# Altium PCB KeyBoarDisplay.PcbDoc
Units mm, origin at the board's own origin, x right, y up, seen from the top; angles counter-clockwise.
Board outline 93.8 x 86.7 mm, 2 copper layers (Top Layer, Bottom Layer); 48 components, 56 nets, 204 pads, 23 vias.
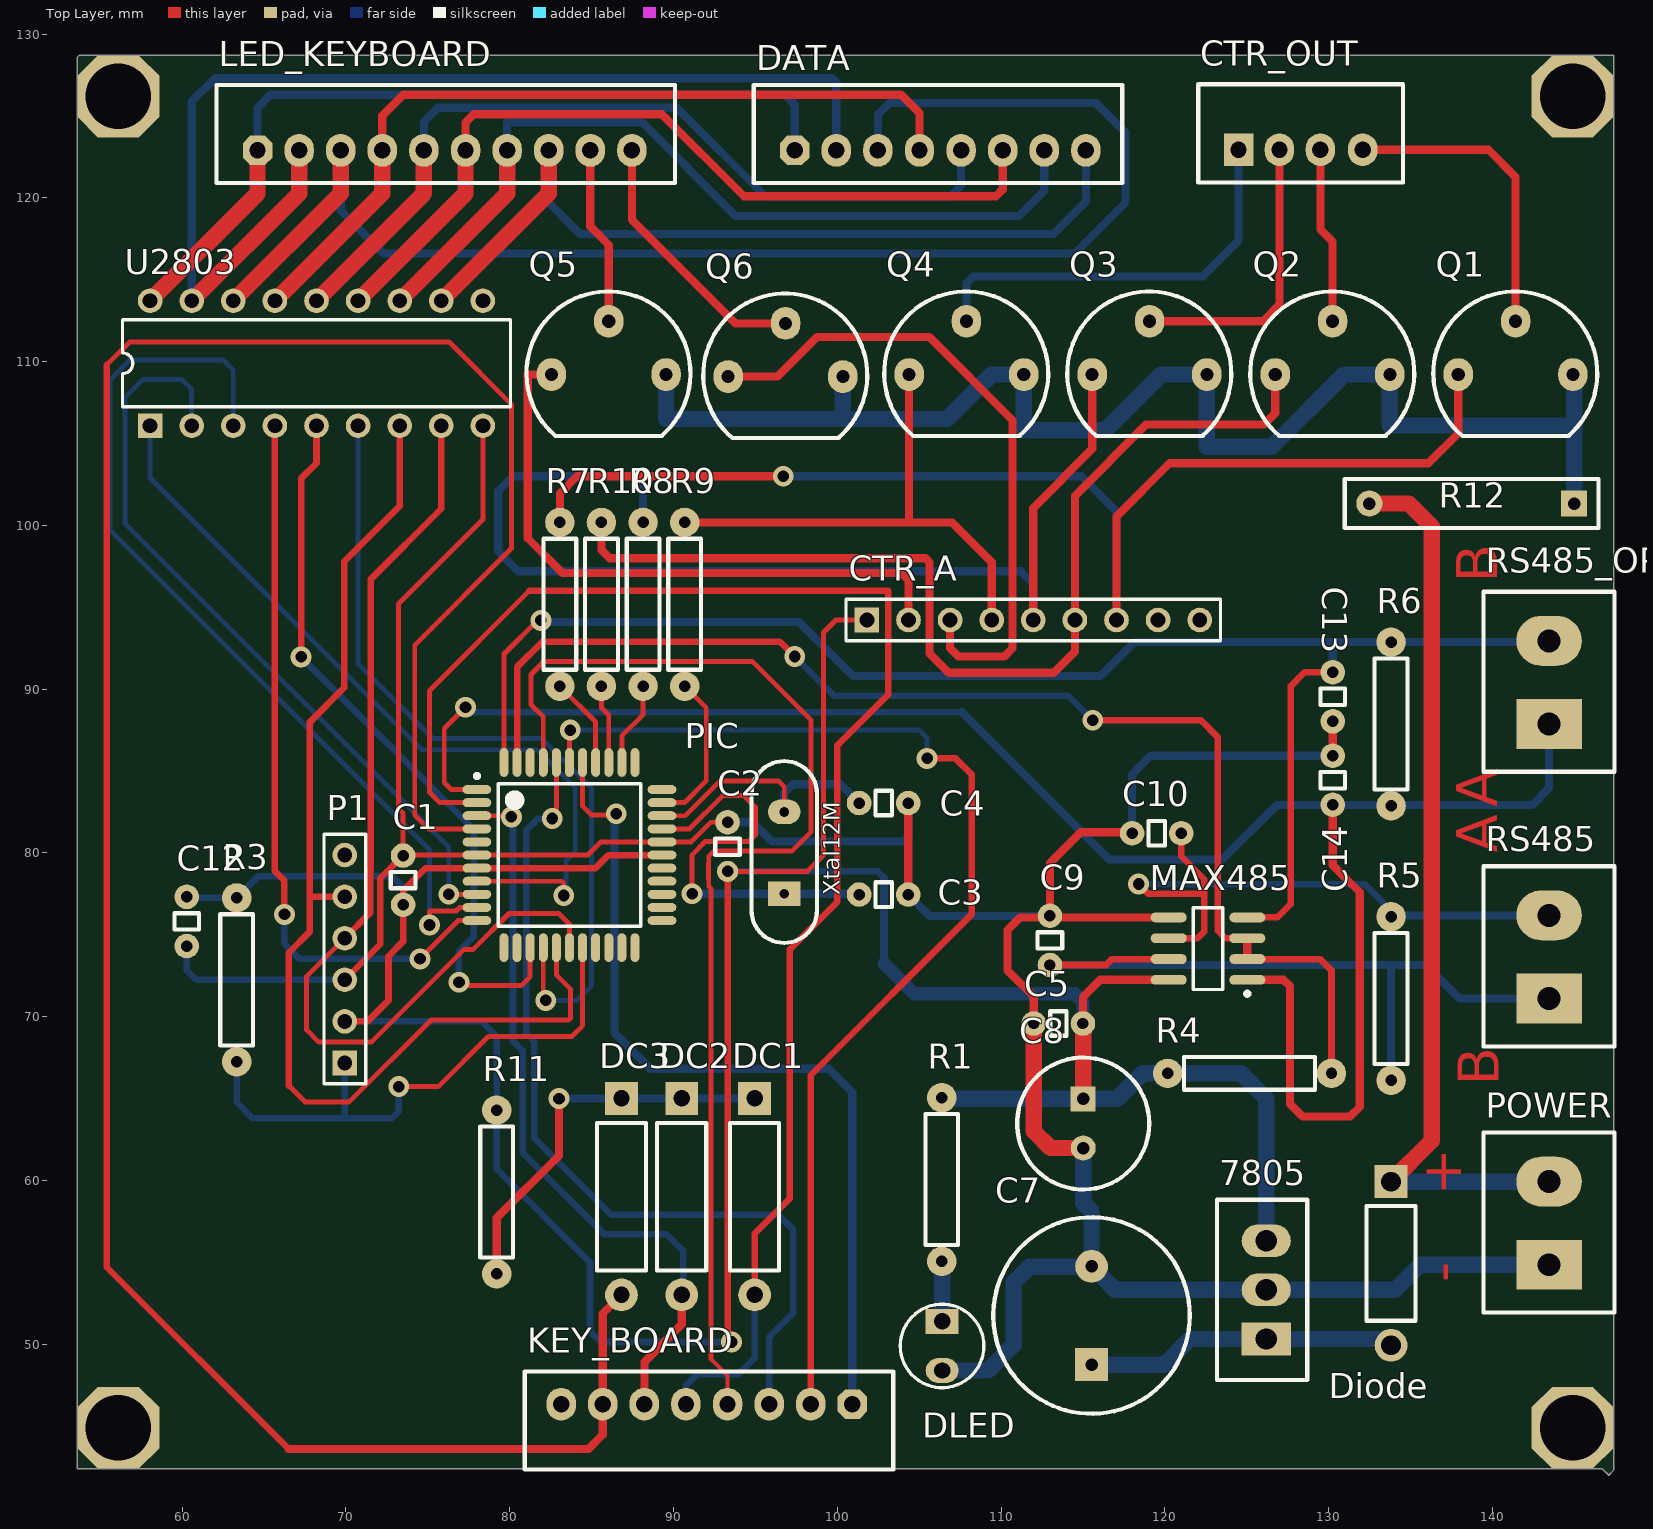
[diagram p0: Top Layer view]
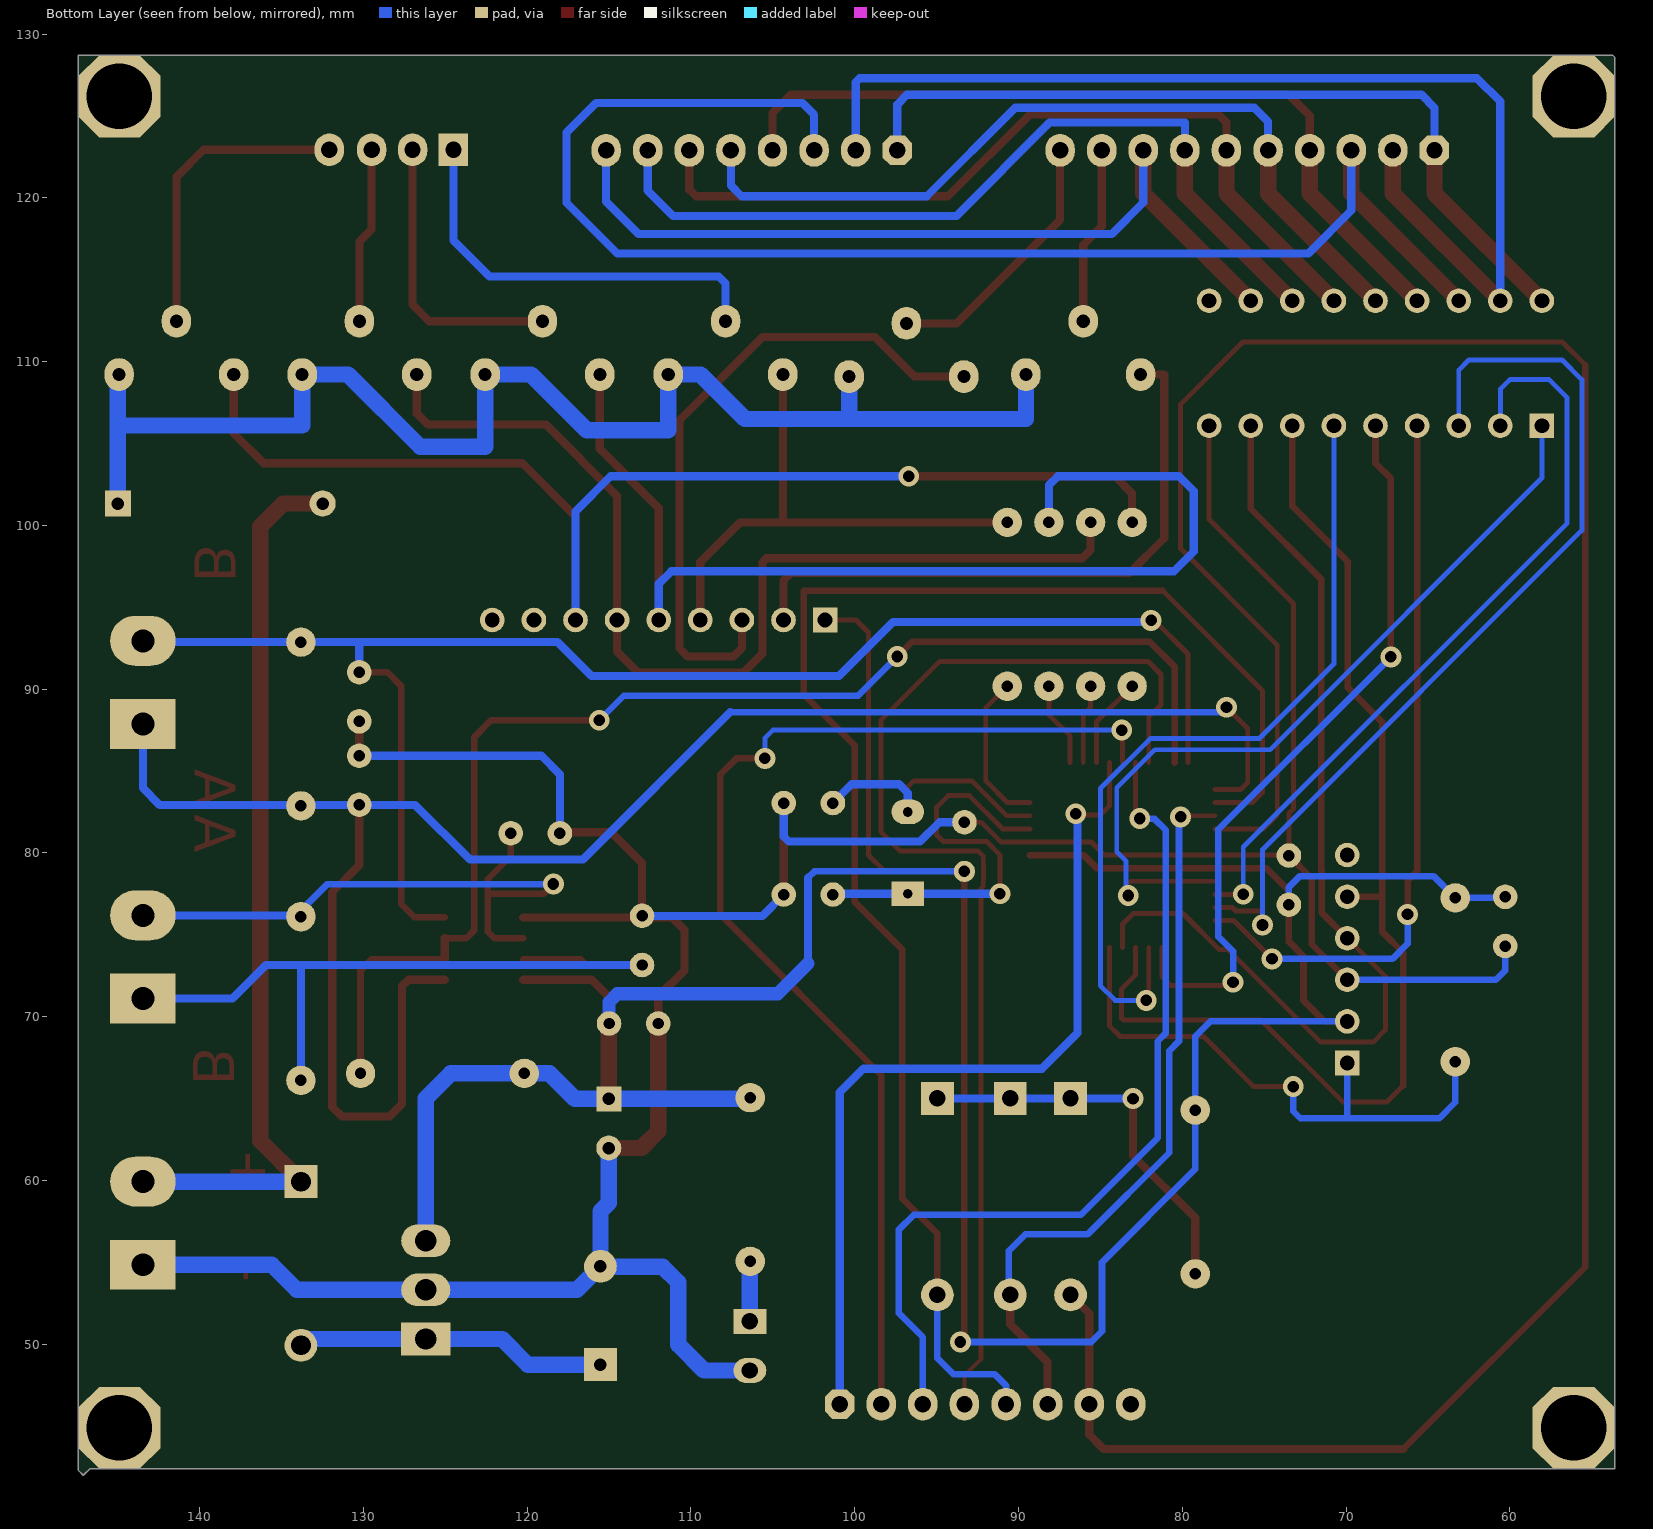
[diagram p1: Bottom Layer view, seen from below]

## Layer stack, top to bottom
Top Layer: signal copper 0.0356
Dielectric: dielectric 0.32, FR-4, Dk 4.8
Bottom Layer: signal copper 0.0356

## Board outline
53.6,128.6 53.7,128.7 147.4,128.7 147.4,42.3 147.1,42 146.7,42.4 53.6,42.4 53.6,128.6

## Design rules (kind name [scope] priority, off if disabled: settings)
Clearance [All] p1: gap=0.254
PolygonConnect [All] p1: connectstyle=Relief reliefconductorwidth=0.254 reliefentries=4 polygonreliefangle="90 Angle"
RoutingVias [All] p1: holewidth=0.711 width=1.27 viastyle="Through Hole" minholewidth=0.711 minwidth=1.27 maxholewidth=0.711 maxwidth=1.27
SilkscreenOverComponentPads [All] p1: minsilkscreentomaskgap=0.254
SolderMaskExpansion [All] p1: expansion=0.102
Width [All] p1: maxlimit=0.254 minlimit=0.254 preferedwidth=0.254
27 further rules are at their usual default settings.

## Components (designator, comment, footprint, x,y, rotation, side; value= is the part's Value field where it differs from the comment)
7805 "Volt Reg" 78xx_NO 126.192,52.822 r90 top
C1 "Cap" tu_gom#1 73.487,77.841 r270 top
C2 "Cap" tu_gom#2 93.299,79.873 r270 top
C3 "Cap" tu_gom#1 103.332,77.46 r0 top
C4 "Cap" tu_gom#1 103.332,83.048 r0 top
C5 "Cap" tu_gom#1 114,69.586 r0 top
C7 "Cap Pol1" "TU 470uF/50V" 115.524,48.758 r90 top
C8 "Cap Pol1" "tu 100uF/50v" 115.016,62.982 r270 top
C9 "Cap" tu_gom#1 112.984,74.158 r270 top
C10 "Cap" tu_gom#1 120,81.2 r0 top
C12 "Cap" tu_gom#1 60.279,76.317 r90 top
C13 "Cap" tu_gom#1 130.256,90.033 r90 top
C14 "Cap" tu_gom#1 130.256,83.937 r270 top
CTR_A "Header 9" HDR1X9 101.808,94.224 r0 top
CTR_OUT "Header 4" "CAP 4" 129.54,122.936 r0 top
DATA "Header 8" Cap_8 97.4,122.9 r0 top
DC1 "Diode" D_1A 94.95,65.014 r270 top
DC2 "Diode" D_1A 90.5,65.014 r270 top
DC3 "Diode" D_1A 86.822,65.014 r270 top
Diode "Diode" D_2A 133.812,59.934 r270 top
DLED "LED0" LED_3 106.4,50.4 r270 top
KEY_BOARD "Header 8" Cap_8 100.919,46.345 r180 top
LED_KEYBOARD "Header 10" CAP_10 64.6,122.9 r0 top
MAX485 "MAX485CSA" NSO8_N 122.636,74.158 r180 top
P1 "Header 6" HDR1X6 69.931,67.173 r90 top
PIC "PIC16F887-I/PT" TQFP-PT44_N 83.647,79.873 r0 top
POWER "Header 2" "Header2 - duplicate" 143.464,59.934 r90 top
Q1 "A1013" A1013 140.416,109.464 r180 top
Q2 "A1013" A1013 129.24,109.464 r180 top
Q3 "A1013" A1013 118.064,109.464 r180 top
Q4 "A1013" A1013 106.888,109.464 r180 top
Q5 "A1013" A1013 85.044,109.464 r180 top
Q6 "A1013" A1013 95.839,109.337 r180 top
R1 "560R" R_Nor 106.38,60.061 r90 top
R3 "10K" R_Nor 63.327,72.253 r90 top
R4 "10K" R_Nor 125.176,66.538 r180 top
R5 "120R" R_Nor 133.812,71.11 r270 top
R6 "120R" R_Nor 133.812,87.874 r90 top
R7 "1K" R_Nor 83.061,95.183 r90 top
R8 "1K" R_Nor 88.141,95.183 r90 top
R9 "1K" R_Nor 90.681,95.183 r90 top
R10 "1K" R_Nor 85.601,95.183 r90 top
R11 "10K" R_Nor 79.202,59.299 r90 top
R12 "22R/1W" R_CS220/470/1W 144.988,101.336 r180 top
RS485 "Header 2" "Header2 - duplicate" 143.464,76.19 r90 top
RS485_OP "Header 2" "Header2 - duplicate" 143.464,92.954 r90 top
U2803 "ULN2803A" DIP18 68.2,109.9 r0 top
? "XTAL" Xtal12M 98.76,80.508 r90 top

## Footprints (in the part's own frame and the unit in brackets; to place one, negate y for a bottom-side part, rotate by r counter-clockwise, add the part's x,y. Pads: shape width x height; smd on the part's side, far side on the other; paste and mask are expansions set on the pad)
78xx_NO [mm]
  rect 2x3 hole 1.3: 1(-2.5,0)
  oval 2x3 hole 1.3: 2(0.5,0) 3(3.5,0)
  silkscreen extent -5,-2.5 6,3
A1013 [mm]
  oval 1.8x2 hole 0.8: 1(-4.5,0.25) 2(-1,-3) 3(2.5,0.25)
  silkscreen extent -5.99,-4.82 4.02,4
"CAP 4" [mm]
  rect 1.8x2 hole 1: 1(-5.04,0)
  oval 1.8x2 hole 1: 2(-2.54,0) 3(-0.04,0) 4(2.54,0)
  silkscreen extent -7.5,-2 5,4
Cap_8 [mm]
  oct 1.8x1.8 hole 1: 1(0,0)
  oval 1.8x2 hole 1: 2(2.54,0) 3(5.08,0) 4(7.62,0) 5(10.16,0) 6(12.7,0) 7(15.24,0) 8(17.78,0)
  silkscreen extent -2.5,-2 20,4
CAP_10 [mm]
  oct 1.8x1.8 hole 1: 1(0,0)
  oval 1.8x2 hole 1: 2(2.54,0) 3(5.08,0) 4(7.62,0) 5(10.16,0) 6(12.7,0) 7(15.24,0) 8(17.78,0) 9(20.32,0) 10(22.86,0)
  silkscreen extent -2.5,-2 25.5,4
D_1A [mm]
  rect 2x2 hole 1: 1(0,0)
  round 2 hole 1: 2(12,0)
  silkscreen extent 1.5,-1.5 10.5,1.5
D_2A [mm]
  rect 2x2 hole 1.2: 1(0,0)
  round 2 hole 1.2: 2(10,0)
  silkscreen extent 1.5,-1.5 8.5,1.5
DIP18 [mm] "DIP; 18 Leads; Row Spacing 7.62 mm; Pitch 2.54 mm"
  rect 1.5x1.5 hole 0.9: 1(-10.16,-3.81)
  round 1.5 hole 0.9: 2(-7.62,-3.81) 3(-5.08,-3.81) 4(-2.54,-3.81) 5(0,-3.81) 6(2.54,-3.81) 7(5.08,-3.81) 8(7.62,-3.81) 9(10.16,-3.81) 10(10.16,3.81) 11(7.62,3.81) 12(5.08,3.81) 13(2.54,3.81) 14(0,3.81) 15(-2.54,3.81) 16(-5.08,3.81) 17(-7.62,3.81) 18(-10.16,3.81)
  silkscreen extent -11.85,-2.65 11.85,2.65
HDR1X6 [mm] "Connector; Header; 6 Position"
  rect 1.5x1.5 hole 0.9: 1(0,0)
  round 1.5 hole 0.9: 2(2.54,0) 3(5.08,0) 4(7.62,0) 5(10.16,0) 6(12.7,0)
  silkscreen extent -1.27,-1.27 13.97,1.27
HDR1X9 [mm] "Connector; Header; 9 Position"
  rect 1.5x1.5 hole 0.9: 1(0,0)
  round 1.5 hole 0.9: 2(2.54,0) 3(5.08,0) 4(7.62,0) 5(10.16,0) 6(12.7,0) 7(15.24,0) 8(17.78,0) 9(20.32,0)
  silkscreen extent -1.27,-1.27 21.59,1.27
"Header2 - duplicate" [mm]
  rect 3.048x4 hole 1.4: 1(-5.08,0)
  oval 3.048x4 hole 1.4: 2(0,0)
  silkscreen extent -8,-4 3,4
LED_3 [mm]
  rect 1.524x2 hole 1: 1(-1,0)
  oval 1.524x2 hole 1: 2(2,0)
  silkscreen extent -2.05,-2.55 3.05,2.55
NSO8_N [mm] "SOIC, 8-Leads, Body 4.9x3.9mm, Pitch 1.27mm, IPC Medium Density"
  oval 2.2x0.6 smd: 1(-2.4,1.905) 2(-2.4,0.635) 3(-2.4,-0.635) 4(-2.4,-1.905) 5(2.4,-1.905) 6(2.4,-0.635) 7(2.4,0.635) 8(2.4,1.905)
  silkscreen extent -2.53,-2.5 0.9,2.88, body extent -2,-2.5 2,2.5, height 1.75
R_CS220/470/1W [mm]
  rect 1.6x1.6 hole 0.762: 1(0,0)
  round 1.6 hole 0.762: 2(12.5,0)
  silkscreen extent -1.5,-1.5 14,1.5
R_Nor [mm]
  round 1.8 hole 0.7: 1(-5,0) 2(5,0)
  silkscreen extent -4,-1 4,1
TQFP-PT44_N [mm] "Thin QFP, 44-Leads, Body 10x10mm, Pitch 0.8mm, IPC Medium Density"
  oval 1.75x0.55 smd: 1(-5.65,4) 2(-5.65,3.2) 3(-5.65,2.4) 4(-5.65,1.6) 5(-5.65,0.8) 6(-5.65,0) 7(-5.65,-0.8) 8(-5.65,-1.6) 9(-5.65,-2.4) 10(-5.65,-3.2) 11(-5.65,-4) 23(5.65,-4) 24(5.65,-3.2) 25(5.65,-2.4) 26(5.65,-1.6) 27(5.65,-0.8) 28(5.65,0) 29(5.65,0.8) 30(5.65,1.6) 31(5.65,2.4) 32(5.65,3.2) 33(5.65,4)
  oval 0.55x1.75 smd: 12(-4,-5.65) 13(-3.2,-5.65) 14(-2.4,-5.65) 15(-1.6,-5.65) 16(-0.8,-5.65) 17(0,-5.65) 18(0.8,-5.65) 19(1.6,-5.65) 20(2.4,-5.65) 21(3.2,-5.65) 22(4,-5.65) 34(4,5.65) 35(3.2,5.65) 36(2.4,5.65) 37(1.6,5.65) 38(0.8,5.65) 39(0,5.65) 40(-0.8,5.65) 41(-1.6,5.65) 42(-2.4,5.65) 43(-3.2,5.65) 44(-4,5.65)
  silkscreen extent -5.77,-4.35 4.35,4.95, body extent -5,-5 5,5, height 1.2
"tu 100uF/50v" [mil]
  rect 60x60 hole 30: 1(-78.74,0)
  round 60 hole 30: 2(39.37,0)
  silkscreen extent -178,-159 139,159
"TU 470uF/50V" [mm]
  rect 2x2 hole 0.762: 1(0,0)
  round 2 hole 0.762: 2(6,0)
  silkscreen extent -3,-6 9,6
tu_gom#1 [mm]
  round 1.5 hole 0.7: 1(-2,0) 2(1,0)
  silkscreen extent -1,-0.75 0,0.75
tu_gom#2 [mm]
  round 1.5 hole 0.7: 1(-2,0)
  round 1.3 hole 0.7: 2(1,0)
  silkscreen extent -1,-0.75 0,0.75
Xtal12M [mm]
  rect 1.5x2 hole 0.6: 1(-3,2)
  oval 1.5x2 hole 0.6: 2(2,2)
  silkscreen extent -6,0 5.1,4

## Part data
7805: "Voltage Regulator"
C1 C2 C3 C4 C5 C9 C10 C12 C13 C14: library part Ceramic, "Capcitor"
C7 C8: "Polarized Capacitor (Radial)"
CTR_A: "Header, 9-Pin"
CTR_OUT: "Header, 4-Pin"
DATA KEY_BOARD: "Header, 8-Pin"
DC1 DC2 DC3 Diode: "Default Diode"
DLED: "Typical INFRARED GaAs LED"
LED_KEYBOARD: "Header, 10-Pin"
MAX485: "Low-Power, Slew-Rate-Limited RS-485/RS-422 Transceiver"
P1: "Header, 6-Pin"
PIC: "Flash-Based, 8-Bit CMOS Microcontroller with nanoWatt Technology, 8K (x14-Bit words) Program Memory, 624 Bytes Data Memory, 35 I/O pins, 44-Pin TQFP, Standard VDD Range, Industrial Temperature"
POWER RS485 RS485_OP: "Header, 2-Pin"
Q1 Q2 Q3 Q4 Q5 Q6: library part PNP, "PNP Bipolar Transistor"
R1 R3 R4 R5 R6 R7 R8 R9 R10 R11 R12: library part Res
U2803: "Eight Darlington Array"
?: "Crystal Oscillator"

## Free pads (board coordinates)
  oct 5x5 hole 4: 0(56.1,126.2) 1(144.9,126.2) 2(144.9,44.9) 3(56.1,44.9)

## Via types
v1: diameter 1.27, hole 0.711, Top Layer to Bottom Layer, 23 vias

## Nets (pads, with @x,y where several pads share a name; then routed paths per layer and width w, separated by ;. In a path a pad name is that pad's centre, name@x,y a point inside that pad or via, vN(x,y) a via of type N, cw(c..) or ccw(c..) an arc to the next point about the centre after c; other vN are vias at no path point)
+12V: Diode.1 POWER.2 R12.2 | length 55.1
  Top Layer w1: R12.2 134.9,101.336 136.3,99.936 136.3,62.422 Diode.1
  Bottom Layer w1: Diode.1 POWER.2
A1: CTR_A.4 Q4.3 R9.2 | length 32.3
  Top Layer w0.5: R9.2 104.388,100.183 ; Q4.3 104.388,105.918 104.388,100.183 ; CTR_A.4 109.428,97.772 107.017,100.183 104.388,100.183
A1_K: CTR_A.2 Q5.3 | length 38.2
  Top Layer w0.5: Q5.3 81.1,109.214 81.1,99.215 83.215,97.1 103.9,97.1 104.348,96.652 CTR_A.2
A1_K_OUT: LED_KEYBOARD.9 Q5.2 | length 10.9
  Top Layer w0.5: LED_KEYBOARD.9 84.92,118.243 86.044,117.119 Q5.2
A2: CTR_A.5 Q3.3 R8.2 | length 67.6
  Top Layer w0.5: CTR_A.5 111.968,101.068 115.564,104.664 Q3.3
  Bottom Layer w0.5: R8.2 88.141,102.459 87.6,103 80.2,103 79.3,102.1 79.3,98.4 80.5,97.2 111.2,97.2 111.968,96.432 CTR_A.5
A2_K: CTR_A.3 Q6.3 | length 40.3
  Top Layer w0.5: Q6.3 96.362,109.087 98.775,111.5 105.619,111.5 110.7,106.419 110.7,92.5 110.2,92 107.4,92 106.888,92.512 CTR_A.3
A2_K_OUT: LED_KEYBOARD.10 Q6.2 | length 16.2
  Top Layer w0.5: LED_KEYBOARD.10 87.46,118.661 93.784,112.337 Q6.2
A3: CTR_A.6 Q2.3 R10.2 | length 63.7
  Top Layer w0.5: R10.2 85.601,98.499 86.1,98 105.378,98 105.634,97.744 105.634,92.188 106.822,91 113.2,91 114.508,92.308 114.508,101.808 118.856,106.156 126.056,106.156 126.74,106.84 Q2.3
A4: CTR_A.7 Q1.3 R7.2 | length 76.6
  Top Layer w0.5: R7.2 83.061,101.961 84.1,103 v1(96.7,103) ; CTR_A.7 117.048,100.548 120.3,103.8 136.1,103.8 137.916,105.616 Q1.3
  Bottom Layer w0.5: v1(96.7,103) 114.9,103 117.048,100.852 CTR_A.7
COL1: DC1.2 KEY_BOARD.5 PIC.2 | length 96.1
  Top Layer w0.3: PIC.2 75.727,83.073 75.1,83.7 75.1,89.9 81.2,96
  Top Layer w0.4: 81.2,96 103.1,96 103.1,89.663 100,86.563 100,77.013 97.1,74.113 97.1,58.9 94.95,56.75 DC1.2
  Bottom Layer w0.4: KEY_BOARD.5 90.759,47.477 91.44,48.158 93.958,48.158 94.95,49.15 DC1.2
COL2: DC2.2 KEY_BOARD.6 PIC.3 | length 45.4
  Top Layer w0.254: v1@79.855,81.765 v1@79.855,82.273
  Top Layer w0.3: PIC.3 v1@79.855,82.273
  Top Layer w0.5: KEY_BOARD.6 88.219,48.919 90.5,51.2 DC2.2@90.5,52.628
  Bottom Layer w0.254: DC2.2@90.6,53.3 DC2.2@90.886,53.014
  Bottom Layer w0.4: v1@80.2,82.2 80.2,68.51 80.8,67.91 80.8,61.7 85.789,56.711 89.589,56.711 90.6,55.7 DC2.2@90.6,53.3
  other v1: 80.1,82.2
COL3: DC3.2 KEY_BOARD.7 PIC.4 | length 157.9
  Top Layer w0.3: 55.4,109.8 56.8,111.2 76.3,111.2 80.1,107.4 80.1,98.591 74.2,92.691 74.2,82.3 75.027,81.473 PIC.4
  Top Layer w0.4: 55.4,109.8 55.4,54.7 66.5,43.6
  Top Layer w0.5: 66.5,43.6 84.8,43.6 85.679,44.479 85.679,51.871 DC3.2
COL4: PIC.5
DI: C13.2 MAX485.4 PIC.44 R6.2 RS485_OP.2 | length 94.5
  Top Layer w0.3: PIC.44 79.647,92.147 v1@81.8,94.3
  Top Layer w0.4: MAX485.4 126.863,76.063 127.7,76.9 127.7,90.2 128.533,91.033 C13.2
  Bottom Layer w0.254: RS485_OP.2@143.384,92.874 RS485_OP.2
  Bottom Layer w0.5: v1@81.9,94.1 97.662,94.1 100.962,90.8 116.074,90.8 118.148,92.874 130.256,92.874 ; C13.2 130.256,92.874 ; RS485_OP.2@143.384,92.874 R6.2 130.256,92.874
  other v1: 81.9,94.2
EN: MAX485.2 MAX485.3 PIC.43 R4.1 | length 78.5
  Top Layer w0.4: PIC.43 80.447,91.347 82,92.9 96.5,92.9 v1(97.4,92) ; v1(115.6,88.1) 122.2,88.1 123.243,87.057 123.243,75.257 123.707,74.793 MAX485.3 ; MAX485.2 129.477,73.523 130.176,72.824 R4.1
  Top Layer w0.5: MAX485.2 MAX485.3
  Bottom Layer w0.4: v1(97.4,92) 99.8,89.6 114.1,89.6 v1(115.6,88.1)
GND: 7805.2 C1.1 C2.1 C3.2 C4.2 C5.1 C7.2 C8.2 C9.1 C10.1 C12.1 C13.1 C14.1 DLED.2 MAX485.5 P1.3 PIC.6 PIC.29 POWER.1 U2803.9 | length 202.5
  Top Layer w0.3: U2803.9 78.36,100.36 73.2,95.2 73.2,82.7 73.487,82.413 73.487,79.873 PIC.6 84.773,79.873 85.573,80.673 PIC.29 91.073,80.673 92.273,81.873 C2.1
  Top Layer w0.4: P1.3 72.1,74.422 72.1,78.454 C1.1
  Top Layer w0.5: C3.2 C4.2 ; C5.1 112,71.236 110.4,72.836 110.4,75.3 111.163,76.063 MAX485.5 ; C9.1 112.984,79.384 114.87,81.27 C10.1@118,81.27 ; C14.1 C13.1
  Top Layer w1: C5.1 112,63 113.018,61.982 C8.2
  Bottom Layer w0.4: C12.1 60.279,72.821 60.847,72.253 P1.3
  Bottom Layer w0.5: C2.1 94.827,81.873 96.004,80.696 104.028,80.696 104.332,81 C4.2 ; C3.2 105.634,76.158 C9.1 ; C10.1@118,81.27 118,84.8 119.137,85.937 C14.1
  Bottom Layer w1: DLED.2 109.2,48.4 110.781,49.981 110.781,53.781 111.724,54.724 C7.2@115.524,54.724 ; C8.2 115.016,58.623 115.524,58.115 C7.2 116.96,53.322 7805.2 134.061,53.322 135.593,54.854 POWER.1
ICSPCLK: P1.5 PIC.16 U2803.7 | length 69.6
  Top Layer w0.254: 67.799,75.201 67.8,75.2 ; 83.6,69.8 83.7,69.9
  Top Layer w0.3: 66.5,65.8 67.5,64.8 70.2,64.8 75.2,69.8 83.6,69.8 ; PIC.16 82.847,72.553 83.7,71.7 83.7,69.9
  Top Layer w0.4: 66.5,65.8 66.5,73.902 67.799,75.201 ; 67.8,75.2 67.8,88 69.9,90.1 69.9,97.8 73.28,101.18 U2803.7 ; 67.867,77.333 P1.5
ICSPDAT: P1.4 PIC.17 U2803.8 | length 61.6
  Top Layer w0.3: P1.4 67.6,72.462 67.6,69.2 68.347,68.453 71.553,68.453 77.194,74.094 77.751,74.094 79.958,76.3 83,76.3 83.647,75.653 PIC.17 ; 71.496,78.96 71.5,78.964
  Top Layer w0.4: P1.4 71.496,76.358 71.496,78.96 ; 71.5,78.964 71.5,96.7 75.82,101.02 U2803.8
LVP: P1.6
MCLR: P1.1 PIC.18 R3.1 | length 35.4
  Top Layer w0.3: v1(73.228,65.735) 75.635,65.735 78.7,68.8 83.8,68.8 84.447,69.447 PIC.18
  Bottom Layer w0.4: R3.1 63.327,64.773 64.3,63.8 72.8,63.8 73.228,64.228 v1(73.228,65.735) ; 69.931,63.8 P1.1
Net7805_1: 7805.1 C7.1 Diode.2 | length 19.1
  Bottom Layer w0.254: Diode.2@133.424,50.322 Diode.2
  Bottom Layer w1: C7.1 119.958,48.758 121.522,50.322 7805.1 Diode.2@133.424,50.322
Net_1: ?.1 C3.1 PIC.30 | length 25.5
  Top Layer w0.3: PIC.30 90.973,81.473 93,83.5 94.3,83.5 95,82.8 95,81.1 94.596,80.696 91.948,80.696 91.135,79.883 v1(91.135,77.508)
  Bottom Layer w0.5: v1(91.135,77.508) ?.1 C3.1@101.332,77.508
Net_2: ?.2 C4.1 PIC.31 | length 16.5
  Top Layer w0.3: PIC.31 90.716,82.273 92.843,84.4 96.4,84.4 96.76,84.04 ?.2
  Bottom Layer w0.5: ?.2 96.76,83.66 97.3,84.2 100.18,84.2 C4.1
NetC9_2: C9.2 MAX485.7 R5.2 RS485.1 | length 45.8
  Top Layer w0.4: C9.2 116.408,73.158 116.773,73.523 MAX485.7
  Bottom Layer w0.5: C9.2 135.942,73.158 137.99,71.11 RS485.1 ; R5.2 133.812,73.146
NetC10_2: C10.2 MAX485.6 R5.1 RS485.2 | length 39
  Top Layer w0.4: v1(118.4,78.1) 119,77.5 122.4,77.5 ; MAX485.6 121.993,74.793 122.4,75.2 122.4,77.5 ; C10.2@121,81.27 C10.2 121,79.8 122.4,78.4 122.4,77.5
  Bottom Layer w0.254: R5.1 R5.1@133.892,76.19
  Bottom Layer w0.4: v1(118.4,78.1) 132.2,78.1 R5.1@133.812,76.488
  Bottom Layer w0.5: R5.1@133.892,76.19 RS485.2
NetCTR_OUT_1: CTR_OUT.1 Q4.2 | length 25.6
  Bottom Layer w0.5: Q4.2 107.888,114.788 108.3,115.2 122.3,115.2 124.5,117.4 CTR_OUT.1
NetCTR_OUT_2: CTR_OUT.2 Q3.2 | length 17.8
  Top Layer w0.5: Q3.2 125.984,112.464 127,113.48 CTR_OUT.2
NetCTR_OUT_3: CTR_OUT.3 Q2.2 | length 10.8
  Top Layer w0.5: CTR_OUT.3 129.5,118.063 130.24,117.323 Q2.2
NetCTR_OUT_4: CTR_OUT.4 Q1.2 | length 18.8
  Top Layer w0.5: CTR_OUT.4 139.764,122.936 141.416,121.284 Q1.2
NetDC1_1: DC1.1 DC2.1 DC3.1 R11.1 | length 24.9
  Top Layer w0.5: R11.1 79.202,57.702 83.012,61.512 v1@83.012,65.268
  Bottom Layer w0.254: v1(83.012,65) 83.012,65.268 v1@83.266,65.014
  Bottom Layer w0.5: v1@83.266,65.014 DC3.1 DC1.1
NetDLED_1: DLED.1 R1.1 | length 3.6
  Bottom Layer w1: DLED.1 R1.1@106.4,55.041
NetPIC_8: PIC.8 U2803.1 | length 49.9
  Top Layer w0.254: PIC.8 83.175,78.273 83.3,78.148 v1(83.3,77.4)
  Bottom Layer w0.3: U2803.1 58.04,102.894 74.634,86.3 81.673,86.3 84,83.973 84,80.083 83.439,79.522 v1@83.439,77.4
NetPIC_9: PIC.9 U2803.2 | length 47.2
  Top Layer w0.3: v1(76.276,77.473) PIC.9
  Bottom Layer w0.3: U2803.2 60.58,108.32 60,108.9 57.6,108.9 56.5,107.8 56.5,100.143 76.276,80.367 v1(76.276,77.473)
NetPIC_10: PIC.10 U2803.3 | length 56.9
  Top Layer w0.254: 75.1,76.421 75.133,76.454
  Top Layer w0.3: v1(75.1,75.6) 75.1,76.421 ; 75.133,76.454 76.718,76.454 76.937,76.673 PIC.10
  Bottom Layer w0.3: U2803.3 63.12,109.48 62.5,110.1 56.8,110.1 55.6,108.9 55.6,99.7 75.1,80.2 v1(75.1,75.6)
NetPIC_11: PIC.11 U2803.4 | length 45
  Top Layer w0.3: v1(74.524,73.533) 76.864,75.873 PIC.11
  Top Layer w0.4: U2803.4 65.66,78.883 66.243,78.3 v1(66.243,76.251)
  Bottom Layer w0.4: v1(66.243,76.251) 66.243,74.457 67.167,73.533 v1(74.524,73.533)
NetPIC_14: PIC.14 U2803.5 | length 45.6
  Top Layer w0.254: v1@76.776,71.924 v1@76.8,71.9
  Top Layer w0.3: v1@76.8,71.9 80.7,71.9 81.247,72.447 PIC.14
  Top Layer w0.4: v1(67.259,91.973) 67.259,102.859 68.2,103.8 U2803.5
  Bottom Layer w0.4: v1(67.259,91.973) 77.8,81.432 77.8,74.9 76.9,74 v1(76.9,72.1)
NetPIC_15: PIC.15 U2803.6 | length 50.8
  Top Layer w0.254: v1@82,71.2 v1(82.2,71)
  Top Layer w0.3: v1@82.047,70.9 PIC.15
  Bottom Layer w0.3: U2803.6 70.74,91.541 75.281,87 81.935,87 85,83.935 85,80.045 85,71.9 84.1,71 v1(82.2,71)
NetPIC_32: PIC.32 R9.1 | length 9.6
  Top Layer w0.3: PIC.32 90.673,83.073 92,84.4 92,88.864 R9.1
NetPIC_35: PIC.35 R8.1 | length 5.2
  Top Layer w0.3: PIC.35 86.847,87.147 88.141,88.441 R8.1
NetPIC_36: PIC.36 R10.1 | length 4.8
  Top Layer w0.3: R10.1 85.601,88.872 86.047,88.426 PIC.36
NetPIC_37: PIC.37 R7.1 | length 5.6
  Top Layer w0.3: R7.1 85.247,87.997 PIC.37
NetQ1_1: Q1.1 Q2.1 Q3.1 Q4.1 Q5.1 Q6.1 R12.1 | length 87
  Top Layer w0.254: Q1.1 Q1.1@144.988,109.142
  Bottom Layer w0.254: 144.916,106.1 Q1.1
  Bottom Layer w1: Q5.1 89.544,106.5 100.339,106.5 ; Q6.1 100.339,106.5 ; 144.916,106.1 133.74,106.1 Q2.1 130.943,109.214 126.529,104.8 122.564,104.8 Q3.1 119.767,109.214 116.353,105.8 111.388,105.8 Q4.1 109.414,109.214 106.7,106.5 100.339,106.5 ; R12.1 Q1.1@144.988,109.142
OUT1: DATA.1 LED_KEYBOARD.1 U2803.18 | length 50.7
  Top Layer w1: U2803.18 64.6,120.27 LED_KEYBOARD.1
  Bottom Layer w0.5: LED_KEYBOARD.1 64.6,125.5 65.4,126.3 96.8,126.3 97.4,125.7 DATA.1
OUT2: DATA.2 LED_KEYBOARD.2 U2803.17 | length 68.3
  Top Layer w1: U2803.17 67.14,120.27 LED_KEYBOARD.2
  Bottom Layer w0.5: U2803.17 60.58,125.88 62,127.3 99.7,127.3 99.94,127.06 DATA.2
OUT3: DATA.3 LED_KEYBOARD.3 U2803.16 | length 88.5
  Top Layer w1: U2803.16 69.68,120.27 LED_KEYBOARD.3
  Bottom Layer w0.5: LED_KEYBOARD.3 69.68,119.22 72.3,116.6 114.5,116.6 117.6,119.7 117.6,124 115.8,125.8 103.2,125.8 102.48,125.08 DATA.3
OUT4: DATA.4 LED_KEYBOARD.4 U2803.15 | length 50.1
  Top Layer w0.5: LED_KEYBOARD.4 72.22,125.02 73.5,126.3 103.9,126.3 105.02,125.18 DATA.4
  Top Layer w1: U2803.15 72.22,120.27 LED_KEYBOARD.4
OUT5: DATA.5 LED_KEYBOARD.5 U2803.14 | length 51.5
  Top Layer w1: U2803.14 74.76,120.27 LED_KEYBOARD.5
  Bottom Layer w0.5: LED_KEYBOARD.5 74.76,124.66 75.6,125.5 90.2,125.5 95.6,120.1 106.9,120.1 107.56,120.76 DATA.5
OUT6: DATA.6 LED_KEYBOARD.6 U2803.13 | length 52.3
  Top Layer w0.254: LED_KEYBOARD.6 LED_KEYBOARD.6@78.054,122.9
  Top Layer w0.5: LED_KEYBOARD.6@77.3,122.6 77.3,124.6 77.8,125.1 89.3,125.1 94.3,120.1 109.7,120.1 110.1,120.5 DATA.6
  Top Layer w1: U2803.13 77.3,120.27 LED_KEYBOARD.6
OUT7: DATA.7 LED_KEYBOARD.7 U2803.12 | length 51.9
  Top Layer w1: U2803.12 79.84,120.27 LED_KEYBOARD.7
  Bottom Layer w0.5: LED_KEYBOARD.7 79.84,124.6 88.093,124.6 93.793,118.9 111.1,118.9 112.64,120.44 DATA.7
OUT8: DATA.8 LED_KEYBOARD.8 U2803.11 | length 52.6
  Top Layer w1: U2803.11 82.38,120.27 LED_KEYBOARD.8
  Bottom Layer w0.5: LED_KEYBOARD.8 82.38,119.72 84.3,117.8 113.2,117.8 115.18,119.78 DATA.8
RO: C14.2 MAX485.1 PIC.1 R6.1 RS485_OP.1 | length 117
  Top Layer w0.3: v1(77.3,88.9) 76,87.6 76,84.3 76.427,83.873 PIC.1
  Top Layer w0.5: MAX485.1 127.247,72.253 127.635,71.865 127.635,64.665 128.4,63.9 131.3,63.9 131.9,64.5 131.9,77.6 130.256,79.244 C14.2
  Bottom Layer w0.254: v1(77.3,88.9) v1@77.6,88.6
  Bottom Layer w0.4: v1@77.6,88.6 107.6,88.6
  Bottom Layer w0.5: 107.6,88.6 116.6,79.6 123.5,79.6 126.837,82.937 142.437,82.937 143.464,83.964 RS485_OP.1
ROW1: KEY_BOARD.1 PIC.38 | length 53.4
  Top Layer w0.254: v1@86.4,82.324 86.4,82.3 v1(86.5,82.4)
  Top Layer w0.3: PIC.38 84.447,82.853 84.976,82.324 v1@86.4,82.324
  Bottom Layer w0.5: v1@86.4,82.324 86.4,69 88.573,66.827 99.473,66.827 100.919,65.381 KEY_BOARD.1
ROW2: KEY_BOARD.2 PIC.39 | length 70.8
  Top Layer w0.3: PIC.39 v1@83.647,87.5
  Top Layer w0.4: KEY_BOARD.2 98.379,66.426 108.2,76.247 108.2,84.8 107.224,85.776 v1(105.486,85.776)
  Bottom Layer w0.3: v1(83.7,87.5) 105,87.5 105.486,87.014 v1(105.486,85.776)
ROW3: KEY_BOARD.3 PIC.40 | length 53.4
  Top Layer w0.3: v1@82.847,82.347 PIC.40
  Bottom Layer w0.4: v1(82.6,82.1) 81.719,82.1 81,81.381 81,69 81.5,68.5 81.5,62.6 86.2,57.9 96.4,57.9 97.3,57 97.3,51.9 95.839,50.439 KEY_BOARD.3
ROW4: KEY_BOARD.4 PIC.41 | length 72.2
  Top Layer w0.254: 92.3,49.102 93.299,48.103 KEY_BOARD.4
  Top Layer w0.3: PIC.41 82.047,88.311 81.3,89.058 81.3,90.9 82.094,91.694 94.806,91.694 98.4,88.1 98.4,81.3 97.212,80.112 92.456,80.112 92.151,79.807 92.151,79.357 92.145,79.351 92.145,78.395 92.151,78.389 92.151,77.961 92.3,77.813 92.3,49.102
VCC: 7805.3 C1.2 C2.2 C5.2 C8.1 C12.2 CTR_A.1 MAX485.8 P1.2 PIC.7 PIC.28 R1.2 R3.2 R4.2 R11.2 | length 203.8
  Top Layer w0.3: C2.2 98.173,78.873 99.162,79.862 99.162,93.462 99.924,94.224 CTR_A.1
  Top Layer w0.4: P1.2 71.32,69.713 72.598,70.991 72.598,73.698 73.487,74.587 73.487,77.687 74.873,79.073 PIC.7 85.232,79.073 86.032,79.873 PIC.28 ; C2.2 93.3,50.388 v1(93.548,50.14)
  Top Layer w0.5: C5.2 115,71.2 116.053,72.253 MAX485.8
  Top Layer w1: C8.1 C5.2@115.016,69.586
  Bottom Layer w0.254: C12.2 C12.2@60.343,77.253 ; R1.2 R1.2@106.459,64.982
  Bottom Layer w0.4: C12.2@60.343,77.253 R3.2 64.662,78.588 72.812,78.588 73.487,77.913 C1.2 ; P1.2 78.287,69.713 79.202,68.798 79.202,60.698 84.9,55 84.9,50.8 85.56,50.14 v1(93.548,50.14) ; C2.2 102.458,78.873 102.845,78.486
  Bottom Layer w0.5: 102.845,73.255 102.845,78.486
  Bottom Layer w0.8: 102.845,73.255 104.7,71.4 114.5,71.4 115,70.9 C5.2
  Bottom Layer w1: R1.2@106.459,64.982 117.082,64.982 118.638,66.538 124.662,66.538 126.192,65.008 7805.3
pads on no net: CTR_A.8 CTR_A.9 KEY_BOARD.8 PIC.12 PIC.13 PIC.19 PIC.20 PIC.21 PIC.22 PIC.23 PIC.24 PIC.25 PIC.26 PIC.27 PIC.33 PIC.34 PIC.42 U2803.10

## Other copper
Top Layer:
  text "B" at 140.3,96.5 h2.5 r90
  text "A" at 140.3,82.8 h2.5 r90
  text "A" at 140.3,80 h2.5 r90
  text "B" at 140.4,65.8 h2.5 r90
  text "+" at 138.1,59.1 h2.5 r90
  text "-" at 138.1,53.8 h2.5 r90

## Text inside footprints (layer, text, board x,y; h text height)
?: Top Overlay "Xtal12M" at 100.16,77.408 h1 r90